# Altium PCB 5V2.4A.PcbDoc
Units mm, origin at the board's own origin, x right, y up, seen from the top; angles counter-clockwise.
Board outline 105.66 x 34.16 mm, 2 copper layers (Top Layer, Bottom Layer); 26 components, 16 nets, 69 pads, 2 vias.
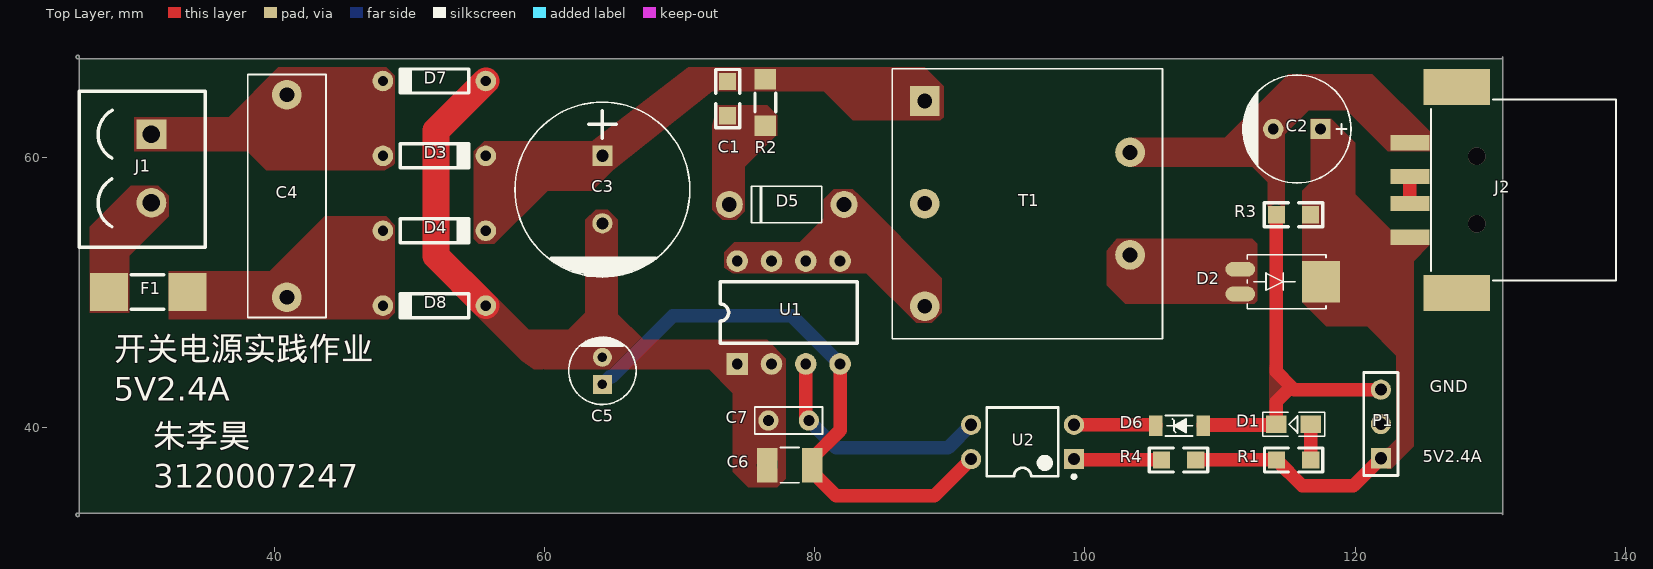
[diagram p0: Top Layer view]
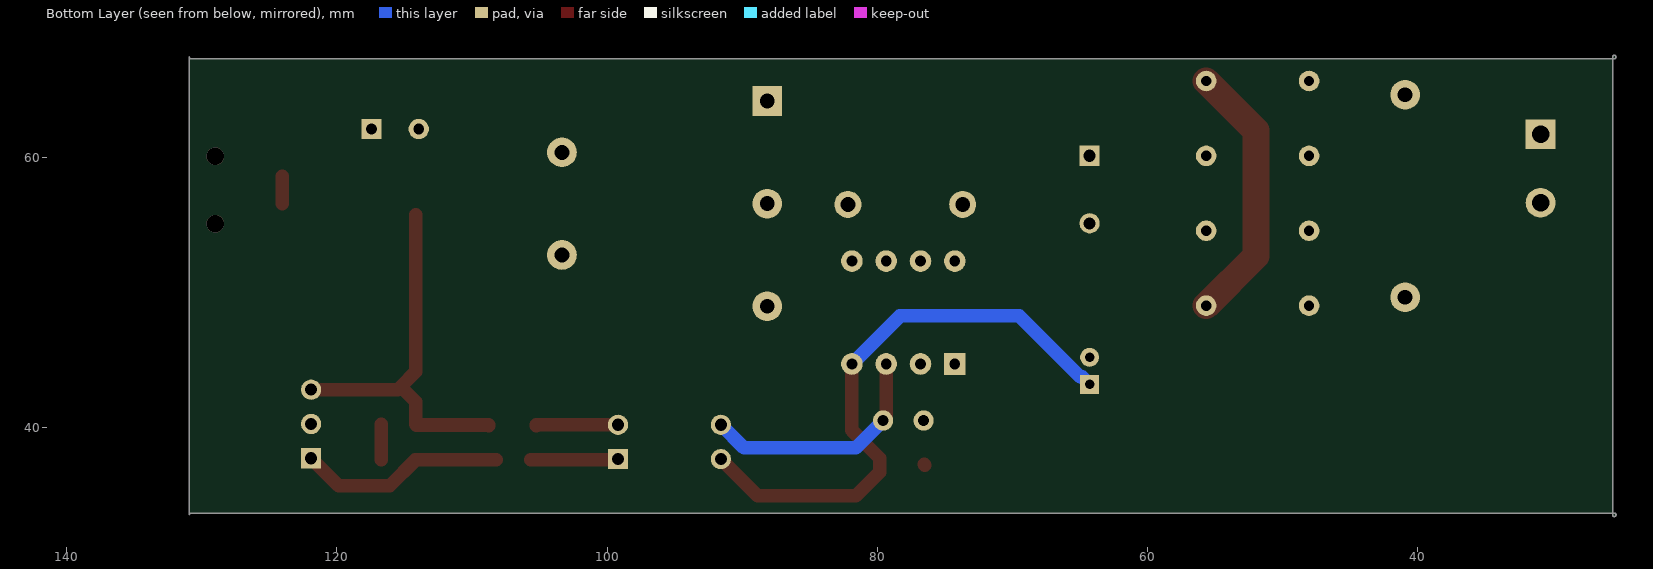
[diagram p1: Bottom Layer view, seen from below]

## Layer stack, top to bottom
Top Solder: solder mask 0.0102, Solder Resist, Dk 3.5
Top Layer: signal copper 0.0356
Dielectric 1: dielectric 0.32, FR-4, Dk 4.8
Bottom Layer: signal copper 0.0356
Bottom Solder: solder mask 0.0102, Solder Resist, Dk 3.5

## Board outline
25.273,33.528 cw(c25.4,33.528) 25.4,33.655 130.81,33.655 cw(c130.81,33.528) 130.937,33.528 130.937,67.437 cw(c130.81,67.437) 130.81,67.31 25.4,67.31 cw(c25.4,67.437) 25.273,67.437 cw(c25.4,67.437) 25.4,67.564 cw(c25.4,67.437) 25.527,67.437 25.527,33.528 cw(c25.4,33.528) 25.4,33.401 cw(c25.4,33.528)

## Design rules (kind name [scope] priority, off if disabled: settings)
Clearance [All] p1: gap=0.254 ignorepadtopadclearanceinfootprint=FALSE except(0: Arc-Hole Track-Hole SMDPad-Hole THPad-Hole Via-Hole Fill-Hole Poly-Hole Region-Hole Text-Hole)
PolygonConnect [All] p1: connectstyle=Direct reliefconductorwidth=0.254 reliefentries=4 polygonreliefangle="90 Angle" airgapwidth=0.254
RoutingVias [All] p1: holewidth=0.711 width=1.27 viastyle="Through Hole" minholewidth=0.711 minwidth=1.27 maxholewidth=0.711 maxwidth=1.27
SolderMaskExpansion [All] p1: expansion=0.102 istentingtop=FALSE
Width [All] p1: maxlimit=2 minlimit=0.254 preferedwidth=1
30 further rules are at their usual default settings.

## Components (designator, comment, footprint, x,y, rotation, side; value= is the part's Value field where it differs from the comment)
C1 "103 250V" CAP_0805 73.533,63.083 r90 top
C2 "470uF 25V" "CAP POLL 直插电解质8*12/8*16" 115.697,62.103 r180 top
C3 "33uF 400V" "Cap POLL 直插电解质 13*20" 64.262,60.118 r270 top
C4 "104" Cap安规104 40.894,64.643 r270 top
C5 "22uF 16V" "CAP POLL 直插电解质5*12" 64.262,44.196 r90 top
C6 "22uF 16V" 1210 76.454,37.211 r0 top
C7 "103 25V" CAP瓷片直插 78.055,40.513 r0 top
D1 "LED_" LED_0805 116.713,40.233 r180 top
D2 "SBD10L45AT3TR" TO-277 111.506,49.88 r0 top
D3 "1N4007" 直插二极管 48.006,60.113 r0 top
D4 "1N4007" 直插二极管 48.006,54.568 r0 top
D5 "HER107" DO-41 82.16,56.515 r180 top
D6 "4.3V" LL-34 108.75,40.132 r180 top
D7 "1N4007" 直插二极管 55.626,65.659 r180 top
D8 "1N4007" 直插二极管 55.626,49.022 r180 top
F1 "Fuse" 2410 27.728,50.038 r0 top
J1 "接线端子2P" 接线端子2P 30.861,61.722 r270 top
J2 "USB Port" "USB-A 母座 贴片" 129.032,57.587 r270 top
P1 "Header 3" HDR1X3 121.92,37.719 r90 top
R1 "10K" Res_0805 116.726,37.592 r180 top
R2 "100K 0.25W" 1206 76.327,62.357 r90 top
R3 "510R" Res_0805 114.173,55.753 r0 top
R4 "2k 1%" Res_0805 105.664,37.592 r0 top
T1 "变压器-双边-8引脚" 变压器EE20-5_5-剪脚 95.738,56.575 r0 top
U1 "DK112" DIP-8 74.245,44.704 r90 top
U2 "PC817A" DIP-4 95.377,38.927 r180 top

## Footprints (in the part's own frame and the unit in brackets; to place one, negate y for a bottom-side part, rotate by r counter-clockwise, add the part's x,y. Pads: shape width x height; smd on the part's side, far side on the other; paste and mask are expansions set on the pad)
1206 [mm]
  rect 1.52x1.6 smd: 1(0,0) 2(3.42,0)
  silkscreen extent 1.02,-0.76 2.41,0.76
1210 [mm]
  rect 1.52x2.54 smd: 1(0,0) 2(3.35,0)
  silkscreen extent 0.97,-1.3 2.37,1.3
2410 [mm]
  rect 2.8x2.8 smd: 1(0,0) 2(5.8,0)
  silkscreen extent 1.65,-1.27 4.06,1.27
"CAP POLL 直插电解质5*12" [mm] "脚间距2mm 直径5mm"
  rect 1.4x1.4 hole 0.7: 1(-1,0)
  round 1.4 hole 0.7: 2(1,0)
  silkscreen extent -2.5,-2.5 2.5,2.5
"CAP POLL 直插电解质8*12/8*16" [mm] "脚间距3.5mm 直径8mm"
  rect 1.5x1.5 hole 0.8: 1(-1.75,0)
  round 1.5 hole 0.8: 2(1.75,0)
  silkscreen extent -4,-4 4,4
"Cap POLL 直插电解质 13*20" [mm] "直径12.5mm 脚间距5mm"
  rect 1.5x1.5 hole 0.9: 1(0,0)
  round 1.5 hole 0.9: 2(5,0)
  silkscreen extent -3.98,-6.48 8.98,6.48
CAP_0805 [mm] "Chip Capacitor, 2-Leads, Body 2.0x1.3mm, IPC Medium Density"
  rect 1.27x1.27 smd: 1(0,0) 2(2.54,0)
  silkscreen extent -0.89,-0.89 3.43,0.89
Cap安规104 [mm] "0.1uF  275VAC"
  round 2.2 hole 1.1: 1(0,0) 2(15,0)
  silkscreen extent -1.5,-2.9 16.5,2.9
CAP瓷片直插 [mm]
  round 1.5 hole 0.8: 1(-1.5,0) 2(1.5,0)
  silkscreen extent -2.5,-1 2.5,1
DIP-4 [mm] "DIP; 4 Leads; Row Spacing 7.62 mm; Pitch 2.54 mm"
  rect 1.5x1.5 hole 0.9: 1(-3.81,1.27)
  round 1.5 hole 0.9: 2(-3.81,-1.27) 3(3.81,-1.27) 4(3.81,1.27)
  silkscreen extent -3.94,-2.55 2.65,2.69, body extent -3.15,-2.5 3.15,2.5, height 5.6
DIP-8 [mm] "脚间距2.54mm  宽7.62mm"
  rect 1.6x1.6 hole 0.8: 1(0,0)
  round 1.6 hole 0.8: 2(0,-2.54) 3(0,-5.08) 4(0,-7.62) 5(7.62,-7.62) 6(7.62,-5.08) 7(7.62,-2.54) 8(7.62,0)
  silkscreen extent 1.52,-8.89 6.1,1.27
DO-41 [mm] "二极管直插封装"
  round 2 hole 1.1: 1(0,0) 2(8.5,0)
  silkscreen extent 1.65,-1.35 6.85,1.35
HDR1X3 [mm] "Connector; Header; 3 Position"
  rect 1.5x1.5 hole 0.9: 1(0,0)
  round 1.5 hole 0.9: 2(2.54,0) 3(5.08,0)
  silkscreen extent -1.27,-1.27 6.35,1.27
LED_0805 [mil]
  rect 60x50 smd: 1(0,0) 2(100,0)
  silkscreen extent -41,-35 140,35
LL-34 [mm] "贴片稳压二极管"
  rect 1x1.5 smd: 1(0,0) 2(3.5,0)
  silkscreen extent 0.76,-0.76 2.79,0.76
Res_0805 [mm] "Chip Resistor, 2-Leads, Body 2.0x1.3mm, IPC Medium Density"
  rect 1.27x1.27 smd: 1(0,0) 2(2.54,0)
  silkscreen extent -0.89,-0.89 3.43,0.89
TO-277 [mm] "二极管封装"
  oval 2.2x1.1 smd: 1(0,0) 1(0,1.84)
  rect 2.8x3.054 smd: 2(5.969,0.92)
  silkscreen extent 0.51,-1.08 6.35,2.92
"USB-A 母座 贴片" [mm]
  rect 2.65x4.9 smd: 0(-7.625,-1.5) 0(7.625,-1.5)
  rect 1.12x2.88 smd: 1(3.5,-4.96) 2(1,-4.96) 3(-1,-4.96) 4(-3.5,-4.96)
  silkscreen extent -6.7,-3.4 6.7,10.3
变压器EE20-5_5-剪脚 [mm] "EE20骨架，10个引脚  2、4、7、8、10剪脚"
  round 2.2 hole 1.1: 0(-7.6,0) 4(-7.6,-7.6) 6(7.6,3.8) 7(7.6,-3.8)
  rect 2.2x2.2 hole 1.1: 1(-7.6,7.6)
  silkscreen extent -10,-10 10,10
接线端子2P [mm]
  rect 2.2x2.2 hole 1.3: 1(0,0)
  round 2.2 hole 1.3: 2(5.08,0)
  silkscreen extent -3.18,-5.33 8.38,4
直插二极管 [mil]
  round 60 hole 30: 1(0,0) 2(300,0)
  silkscreen extent 50,-35 250,35

## Part data
C1 C4 C6 C7: library part Cap_2
C2 C3 C5: library part Cap_
D2 D5: library part 1N4007
D6: library part 稳压二极管
P1: "Header, 3-Pin", LatestRevisionDate=17-Jul-2002, LatestRevisionNote="Re-released for DXP Platform.", Publisher="Altium Limited"
R1 R2 R3 R4: library part Res_
U2: library part "光耦 - 1"
F1: I hold="2A 250V"

## Via types
v1: diameter 1.3, hole 1.3, Top Layer to Bottom Layer, 2 vias

## Nets (pads, with @x,y where several pads share a name; then routed paths per layer and width w, separated by ;. In a path a pad name is that pad's centre, name@x,y a point inside that pad or via, vN(x,y) a via of type N, cw(c..) or ccw(c..) an arc to the next point about the centre after c; other vN are vias at no path point)
5V/2.4A: C2.1 D2.2 J2.1 P1.1 R1.2 R3.2 R4.2 | length 15.3
  Top Layer w1: R4.2 R1.2 116.091,35.687 119.888,35.687 P1.1
GND1: C2.2 D1.2 D6.1 J2.4 P1.3 R3.1 T1.6 | length 28.7
  Top Layer w1: D6.1 108.75,40.182 114.123,40.182 D1.2 114.173,41.91 115.289,43.026 ; R3.1 114.173,44.142 115.289,43.026 ; P1.3 115.516,42.799 115.289,43.026
L1: F1.1 J1.2
N1: C4.1 D3.1 D7.2 J1.1
NetC1_1: C1.1 D5.2 R2.1
NetC1_2: C1.2 C3.1 D3.2 D4.2 R2.2 T1.1
NetC4_2: C4.2 D4.1 D8.2 F1.2
NetC5_1: C5.1 C6.2 U1.4 U2.4 | length 43.7
  Top Layer w1: U1.4 81.865,39.782 79.804,37.721 C6.2 79.804,36.701 81.58,34.925 88.835,34.925 U2.4
  Bottom Layer w1: C5.1 64.808,43.742 64.951,43.742 69.469,48.26 78.309,48.26 U1.4
NetC7_2: C7.2 U1.3 U2.3 | length 17.9
  Top Layer w1: U1.3 79.325,40.878 79.555,40.648 C7.2
  Bottom Layer w1: C7.2 81.587,38.481 89.851,38.481 U2.3
NetD1_1: D1.1 R1.1 | length 2.6
  Top Layer w1: D1.1 116.719,40.227 116.719,37.598 R1.1
NetD2_1: D2.1 T1.7
NetD5_1: D5.1 T1.4 U1.5 U1.6 U1.7 U1.8
NetD6_2: D6.2 U2.2 | length 6.1
  Top Layer w1: U2.2 105.25,40.197 D6.2
NetJ2_2: J2.2 J2.3 | length 2
  Top Layer w1: J2.2 J2.3
NetR4_1: R4.1 U2.1 | length 6.5
  Top Layer w1: U2.1 99.219,37.624 105.632,37.624 R4.1
PGND1: C3.2 C5.2 C6.1 C7.1 D7.1 D8.1 U1.1 U1.2 | length 19.8
  Top Layer w1: C6.1 C6.1@76.504,37.261
  Top Layer w2: D8.1 51.943,52.705 51.943,61.976 D7.1
pads on no net: J2.0 P1.2 T1.0
copper on no net:
  other v1: 129.032,55.087 129.032,60.087

## Polygon pours and split planes (outlines as drawn)
GND1 on Top Layer "GND1_L01_P032" (solid, pour order 32): 113.665,44.45 113.665,41.656 113.665,41.529 113.665,41.402 113.665,40.386 114.046,40.386 114.427,40.767 114.3,40.894 114.427,42.672 114.554,42.799 114.935,43.18 114.935,43.815 113.919,44.831 113.919,45.212
PGND1 on Top Layer "PGND1_L01_P031" (solid, pour order 31): 59.944,44.323 59.182,44.323 58.293,44.958 54.737,48.514 54.737,50.038 56.007,50.038 58.801,47.244 59.69,47.244
PGND1 on Top Layer "PGND1_L01_P029" (solid, pour order 29): 72.898,46.482 67.31,46.482 65.405,48.387 65.405,55.372 64.643,56.134 63.754,56.134 62.992,55.372 62.992,48.514 61.722,47.244 58.801,47.244 58.801,45.466 59.944,44.323 72.644,44.323
PGND1 on Top Layer "PGND1_L01_P027" (solid, pour order 27): 72.517,46.101 72.898,46.482 76.454,46.482 77.851,45.085 77.851,36.195 77.216,35.56 75.057,35.56 73.914,36.703 73.914,42.545 72.009,44.45
5V/2.4A on Top Layer "5V/2.4A_L01_P026" (solid, pour order 26): 120.904,47.498 123.19,45.212 123.19,48.26 122.047,49.403
5V/2.4A on Top Layer "5V/2.4A_L01_P025" (solid, pour order 25): 125.603,53.594 124.333,52.324 124.333,38.608 122.682,36.957 121.285,36.957 121.285,38.354 121.158,38.481 122.428,38.481 123.063,39.116 123.063,53.34 122.809,53.594
5V/2.4A on Top Layer "5V/2.4A_L01_P024" (solid, pour order 24): 116.713,62.865 116.713,58.166 116.078,57.531 116.078,49.276 117.856,47.498 123.698,47.498 123.698,53.594 120.015,57.277 120.015,61.087 118.237,62.865
GND1 on Top Layer "GND1_L01_P010" (solid, pour order 10): 112.395,59.309 113.538,58.166 113.538,55.118 114.808,55.118 114.808,62.611 114.681,62.738
NetD2_1 on Top Layer "NETD2_1_L01_P014" (solid, pour order 14): 102.341,53.975 112.395,53.975 112.776,53.594 112.776,49.403 112.522,49.149 102.997,49.149 101.6,50.546 101.6,53.086
GND1 on Top Layer "GND1_L01_P009" (solid, pour order 9): 103.378,59.309 112.395,59.309 116.586,63.5 119.38,63.5 122.428,60.452 125.603,60.452 125.603,61.849 121.285,66.167 115.062,66.167 110.363,61.468 103.378,61.468
NetD5_1 on Top Layer "NETD5_1_L01_P008" (solid, pour order 8): 73.914,51.435 83.82,51.435 87.503,47.752 88.646,47.752 89.408,48.514 89.408,51.054 83.312,57.15 82.804,57.658 81.407,57.658 80.645,56.896 80.645,55.499 78.867,53.721 74.041,53.721 73.279,52.959 73.279,51.816
NetC1_1 on Top Layer "NETC1_1_L01_P005" (solid, pour order 5): 72.771,63.881 76.454,63.881 77.216,63.119 77.216,61.595 77.089,61.595 74.803,59.309 74.803,56.007 74.168,55.372 73.152,55.372 72.39,56.134 72.39,62.357
NetC1_2 on Top Layer "NETC1_2_L01_P003" (solid, pour order 3): 56.261,53.594 60.198,57.531 63.5,57.531 65.405,59.436 65.405,61.214 55.499,61.214 54.737,60.452 54.737,53.975 55.118,53.594
NetC1_2 on Top Layer "NETC1_2_L01_P004" (solid, pour order 4): 72.39,64.897 80.645,64.897 82.804,62.738 89.281,62.738 89.535,62.992 89.535,65.278 88.138,66.675 70.612,66.675 63.373,61.087 65.024,59.055
NetC4_2 on Top Layer "NETC4_2_L01_P002" (solid, pour order 2): 32.131,48.006 48.387,48.006 48.895,48.514 48.895,54.991 48.26,55.626 43.688,55.626 39.624,51.562 32.131,51.562
L1 on Top Layer "L1_L01_P001" (solid, pour order 1): 26.289,48.514 29.21,48.514 29.21,52.705 32.131,55.626 32.131,57.15 31.369,57.912 29.337,57.912 26.289,54.864
N1 on Top Layer "N1_L01_P000" (solid, pour order 0): 29.591,60.452 29.591,62.992 36.576,62.992 40.259,66.675 48.26,66.675 48.895,66.04 48.895,59.563 48.768,59.436 48.133,59.055 39.37,59.055 37.973,60.452

## Silkscreen, mask and mechanical layers (free items; w line width, h text height)
Top Overlay:
  text "GND" at 125.553,42.312 h1.52
  text "开关电源实践作业 / 5V2.4A" at 28.084,41.4 h3
  text "5V2.4A" at 125.014,37.112 h1.52
  text "朱李昊 / 3120007247" at 30.99,34.928 h3
Mechanical 1:
  lines w0.254: 25.4,33.528 25.4,67.437 130.81,67.437 130.81,33.528 25.4,33.528